# Altium PCB PCB1.PcbDoc (part 2 of 9)
Units mm, origin at the board's own origin, x right, y up, seen from the top; angles counter-clockwise.
Board outline 227 x 102 mm, 4 copper layers (Top Layer, MidLayer1, MidLayer2, Bottom Layer); 425 components, 426 nets, 1455 pads, 440 vias.
Unrouted connection lines stored in the file: 2.
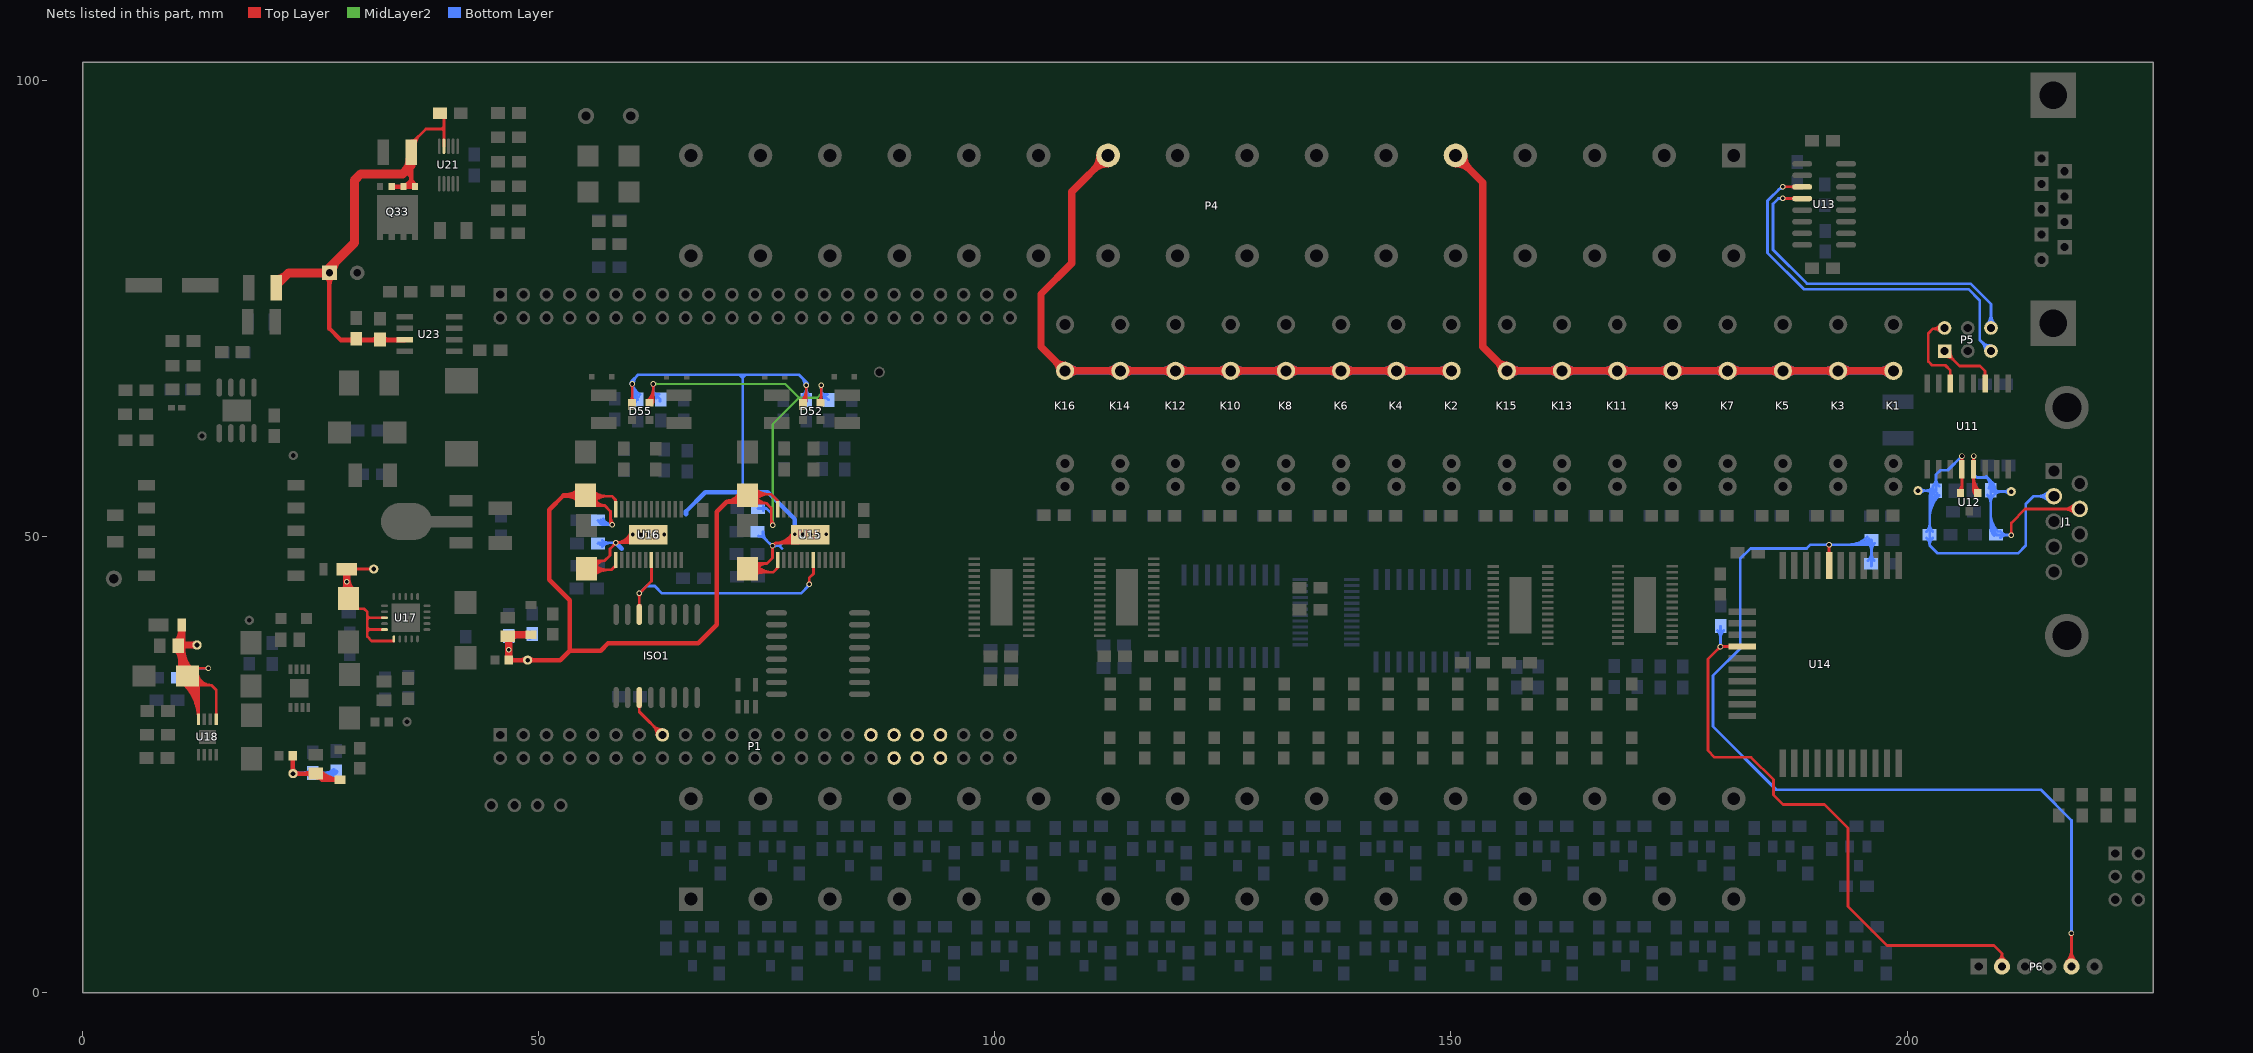
[diagram p4: the nets of this part, all layers, seen from the top]

## Via types
v1: diameter 0.6, hole 0.4, Top Layer to Bottom Layer, 427 vias
v2: diameter 0.5, hole 0.2, Top Layer to Bottom Layer, 9 vias
v3: diameter 0.66, hole 0.33, Top Layer to Bottom Layer, 4 vias

## Nets (pads, with @x,y where several pads share a name; then routed paths per layer and width w, separated by ;. In a path a pad name is that pad's centre, name@x,y a point inside that pad or via, vN(x,y) a via of type N, cw(c..) or ccw(c..) an arc to the next point about the centre after c; other vN are vias at no path point) (continued)
+15V_ISO: C29.1 C31.1 C33.1 C42.1 C44.1 C46.1 C56.1 C57.2 D52.4 D55.4 D58.1 L1.2 R138.1 TP3.1 U15.24 U16.24 | length 197
  Top Layer w0.3: C42.1@54.91,54.417 ccw(c55.962,54.484) C42.1@55.962,53.43 ; C42.1@55.21,54.436 ccw(c56.281,54.504) 56.281,53.43 ; C42.1@55.509,54.455 ccw(c56.601,54.524) 56.601,53.43 ; C42.1@55.605,53.935 cw(c56.872,52.668) 56.872,54.46 ; C42.1@55.605,54.925 ccw(c56.728,56.048) 56.728,54.46 ; C42.1@55.809,54.474 ccw(c56.92,54.544) 56.92,53.43 ; C42.1@55.817,53.723 cw(c57.597,51.943) 57.597,54.46 ; C42.1@55.817,55.137 ccw(c57.452,56.772) 57.452,54.46 ; C42.1@55.88,54.3 56.04,54.46 58.03,54.46 58.461,54.029 U16.24@58.461,53.026 ; C42.1@56.04,53.43 57.24,53.43 ; C42.1@56.108,54.493 ccw(c57.24,54.564) 57.24,53.43 ; 57.87,52.175 ccw(c58.915,52.175) v1@58.176,51.436 ; v1(58.07,51.33) 57.87,51.53 57.87,52.8 57.24,53.43 ; 58.177,54.313 cw(c57.59,53.725) U16.24@58.421,53.725 ; D55.4@61.946,64.894 ccw(c60.462,66.378) 62.56,66.378 ; D55.4@62.158,64.682 ccw(c61.186,65.654) 62.56,65.654 ; D55.4@62.2,64.48 62.56,64.84 v1(62.56,66.76) ; D55.4@62.37,64.47 ccw(c61.911,64.929) D55.4@62.56,64.929 ; v1@62.454,66.654 cw(c62.198,66.398) 62.56,66.398 cw(c62.922,66.398) v1@62.666,66.654 ; C29.1@72.95,54.35 73.27,54.67 75.47,54.67 76.211,53.929 U15.24@76.211,53.026 ; C29.1@72.969,54.447 ccw(c73.869,54.604) C29.1@73.869,53.69 ; C29.1@73.09,53.69 74.94,53.69 ; C29.1@73.264,54.499 ccw(c74.226,54.667) 74.226,53.69 ; C29.1@73.365,54.185 cw(c74.536,53.014) 74.536,54.67 ; C29.1@73.365,55.175 ccw(c74.584,56.394) 74.584,54.67 ; C29.1@73.56,54.55 ccw(c74.583,54.729) 74.583,53.69 ; C29.1@73.577,53.973 cw(c75.26,52.29) 75.26,54.67 ; C29.1@73.577,55.387 ccw(c75.308,57.118) 75.308,54.67 ; C29.1@73.855,54.602 ccw(c74.94,54.791) 74.94,53.69 ; 75.48,52.077 ccw(c76.457,52.077) v1@75.766,51.386 ; v1(75.66,51.28) 75.48,51.46 75.48,53.15 74.94,53.69 ; 75.998,54.142 cw(c75.581,53.725) U15.24@76.171,53.725 ; D52.4@80.686,64.894 ccw(c80.023,65.557) 80.96,65.557 ; v1@80.854,66.514 cw(c80.598,66.258) 80.96,66.258 cw(c81.322,66.258) v1@81.066,66.514 ; D52.4@80.88,64.7 80.96,64.78 v1(80.96,66.62) ; 80.96,65.171 ccw(c81.351,65.171) D52.4@81.074,64.894
  Top Layer w0.5: L1.2@46.72,36.5 46.73,36.49 52.38,36.49 53.42,37.53 ; L1.2@46.879,36.341 cw(c47.239,35.981) 47.239,36.49 ; L1.2@46.879,36.659 ccw(c47.287,37.067) 47.287,36.49 ; TP3.1@48.608,36.308 ccw(c48.167,35.867) 48.167,36.49 ccw(c48.167,37.113) TP3.1@48.608,36.672 ; TP3.1@48.972,36.308 cw(c49.413,35.867) 49.413,36.49 cw(c49.413,37.113) TP3.1@48.972,36.672 ; 52.877,54.53 ccw(c52.877,56.788) C42.1@54.474,55.191 ; 52.998,54.53 cw(c52.998,52.443) C42.1@54.474,53.919 ; C42.1@55.11,54.555 55.085,54.53 52.72,54.53 51.17,52.98 51.17,45.3 53.42,43.05 53.42,37.53 ; 71.392,53.86 ccw(c71.392,55.071) C29.1@72.503,54.589 ; C29.1@72.044,54.788 cw(c70.63,55.402) 70.63,53.86 ; C29.1@72.51,53.86 70.63,53.86 ; 53.42,37.53 56.79,37.53 57.6,38.34 67.51,38.34 69.52,40.35 69.52,52.75 70.63,53.86
  Top Layer w0.8: C56.1@46.61,39.084 46.788,39.262 D58.1@49.16,39.262 ; C56.1@46.66,39.29 C56.1@46.72,39.23 ; L1.2@46.72,36.5 C56.1@46.72,39.084 ; 46.72,38.384 cw(c47.475,38.384) 46.941,38.918 cw(c47.773,38.086) 47.773,39.262
  MidLayer2 w0.254: v1(62.56,66.76) 77.03,66.76 78.54,65.25 ; v1@62.682,66.638 cw(c62.978,66.342) 62.978,66.76 cw(c62.978,67.178) v1@62.682,66.882 ; v1@75.538,51.402 ccw(c75.242,51.698) 75.66,51.698 ccw(c76.078,51.698) v1@75.782,51.402 ; v1(75.66,51.28) 75.66,62.37 78.54,65.25 ; v1@80.838,66.498 cw(c80.591,66.251) 80.94,66.251 ; 80.94,66.154 cw(c81.426,66.154) v1@81.082,66.498 ; v1(80.96,66.62) 80.94,66.6 80.94,65.66 80.53,65.25 78.54,65.25
  Bottom Layer w0.3: C44.1@56.51,51.8 56.98,51.33 v1(58.07,51.33) cw(c58.07,52.398) C44.1@57.085,51.987 ; C44.1@56.531,51.756 ccw(c57.17,52.022) C44.1@57.17,51.33 ; C44.1@56.808,51.871 ccw(c57.62,52.21) 57.62,51.33 ; v1@57.964,51.224 ccw(c57.708,50.968) 57.708,51.33 ccw(c57.708,51.692) v1@57.964,51.436 ; v1@62.454,66.654 cw(c62.198,66.398) 62.56,66.398 cw(c62.922,66.398) v1@62.666,66.654 ; v1(62.56,66.76) 62.56,65.85 63.29,65.12 C46.1@63.29,64.86 ; 62.636,65.774 ccw(c63.027,66.165) C46.1@63.212,65.644 ; 62.654,65.756 cw(c62.085,65.187) C46.1@62.89,65.187 ; C31.1@74.05,53.12 74.98,53.12 75.66,52.44 v1(75.66,51.28) ; C31.1@74.606,52.894 cw(c74.98,52.698) 74.98,53.12 cw(c74.98,53.542) C31.1@74.606,53.346 ; v1@75.554,51.386 ccw(c75.298,51.642) 75.66,51.642 ccw(c76.022,51.642) v1@75.766,51.386 ; v1@80.854,66.514 cw(c80.598,66.258) 80.96,66.258 cw(c81.322,66.258) v1@81.066,66.514 ; v1(80.96,66.62) 80.96,65.84 C33.1@81.78,65.02 ; 81.024,65.776 ccw(c81.475,66.228) C33.1@81.648,65.614 ; 81.042,65.758 cw(c80.431,65.147) C33.1@81.295,65.147
  Bottom Layer w0.5: C57.2@46.448,38.741 cw(c45.791,38.084) 46.72,38.084 cw(c47.649,38.084) C57.2@46.992,38.741 ; v1(46.72,37.63) C57.2@46.72,39.14 49.09,39.14 R138.1@49.28,39.33 ; C57.2@46.992,38.868 cw(c47.649,38.211) 47.649,39.14 cw(c47.649,40.069) C57.2@46.992,39.412 ; 48.198,39.14 ccw(c48.198,40.285) R138.1@49.008,39.475 ; 48.503,39.14 cw(c48.503,38.426) R138.1@49.008,38.931
+16V_ISO: C58.1 C76.1 D63.1 TP4.1 U17.13 U17.15 U17.16 | length 23.6
  Top Layer w0.3: D63.1@29.177,46.238 29.409,46.47 TP4.1@31.92,46.47 ; C58.1@29.98,42.12 30.85,42.12 31.22,41.75 31.22,39.06 31.685,38.595 U17.16@34.125,38.595 ; 31.22,39.62 31.44,39.84 ; 31.22,40.06 31.44,39.84 ; 31.22,40.97 31.39,41.14 ; 31.22,41.31 31.39,41.14 ; U17.15@33.1,39.84 31.44,39.84 ; U17.13@33.1,41.14 31.39,41.14
  Top Layer w0.8: C58.1@28.6,43.89 ccw(c27.718,44.772) v1@28.965,44.772 ; D63.1@28.753,46.238 cw(c28.241,45.726) 28.965,45.726 cw(c29.689,45.726) D63.1@29.177,46.238 ; 28.965,45.569 ccw(c31.339,45.569) C58.1@29.66,43.89 ; D63.1@28.965,46.45 28.965,43.4 C58.1@29.13,43.235
  Bottom Layer w0.8: C76.1@28.93,43.81 28.965,43.845 v1(28.965,45.07) ; 28.965,44.384 ccw(c29.703,44.384) C76.1@29.181,43.862
+24VDC_LIMIT: C86.1 C89.2 C90.2 C92.1 L4.1 Q33.1 Q33.2 Q33.3 R152.1 U21.9 U23.7 | length 74.8
  Top Layer w0.3: C86.1@36.014,92.14 36.014,93.094 37.63,94.71 39.37,94.71 ; C86.1@36.014,93.387 ccw(c36.014,94.094) 36.514,93.594 ; C86.1@36.199,92.902 cw(c37.109,92.902) 36.466,93.546 ; C86.1@36.499,92.902 cw(c38.133,92.902) 36.978,94.058 ; R152.1@39.56,96.34 39.614,96.286 U21.9@39.614,92.81 ; 39.614,94.466 39.37,94.71 ; 39.614,94.954 39.37,94.71
  Top Layer w0.5: C92.1@26.677,78.551 cw(c25.738,77.612) 27.066,77.612 cw(c28.394,77.612) C92.1@27.455,78.551 ; C92.1@27.066,78.94 27.066,72.834 28.32,71.58 35.316,71.58 U23.7@35.33,71.594 ; 29.063,71.58 ccw(c29.063,72.52) C89.2@29.728,71.855 ; 29.078,71.58 cw(c29.078,70.661) C89.2@29.728,71.311 ; C89.2@30.272,71.311 cw(c30.922,70.661) 30.922,71.58 ; C89.2@30.272,71.855 ccw(c30.937,72.52) 30.937,71.58 ; 31.584,71.58 ccw(c31.584,72.646) C90.2@32.338,71.892 ; 31.777,71.58 cw(c31.777,70.787) C90.2@32.338,71.348 ; C90.2@32.882,71.348 cw(c33.443,70.787) 33.443,71.58 ; C90.2@32.882,71.892 ccw(c33.636,72.646) 33.636,71.58 ; Q33.3@33.891,88.396 Q33.1@36.447,88.396 ; Q33.2@35.169,88.521 ccw(c35.169,89.371) 35.77,88.77 ; Q33.2@35.214,88.509 ccw(c35.356,88.744) 35.55,88.55 36.014,89.014 ; 35.55,89.99 36.014,89.526 ; C86.1@35.742,91.106 cw(c35.085,90.449) 36.014,90.449 cw(c36.943,90.449) C86.1@36.286,91.106 ; C86.1@35.825,91.042 cw(c35.644,90.72) 36.014,90.72 ; 36.194,88.834 cw(c35.795,88.434) Q33.1@36.36,88.434 ; C86.1@36.203,91.042 ccw(c36.384,90.72) 36.014,90.72 ; Q33.1@36.478,88.55 36.014,89.014 ; 36.014,89.014 36.014,90.72
  Top Layer w1: L4.1@21.2,77.53 22.61,78.94 C92.1@27.066,78.94 27.066,79.506 29.81,82.25 29.81,89.09 30.51,89.79 35.084,89.79 36.014,90.72 C86.1@36.014,92.14 ; L4.1@21.254,78.197 ccw(c21.254,79.677) 22.3,78.63 ; C92.1@27.366,78.94 cw(c29.457,78.94) 27.978,80.418 ; 35.413,90.119 ccw(c34.278,91.255) C86.1@35.879,91.368
-15V_ISO: C30.2 C32.2 C34.1 C43.2 C45.2 C47.1 C63.2 C64.2 D52.1 D55.1 D60.2 L2.2 R139.1 TP6.1 U15.1 U15.25 U16.1 U16.25 | length 181.3
  Top Layer w0.3: C43.2@55.319,46.617 cw(c56.196,46.495) C43.2@56.196,47.38 ; C43.2@55.616,46.576 cw(c56.54,46.447) 56.54,47.38 ; C43.2@55.7,46.3 55.78,46.38 57.95,46.38 58.461,46.891 U16.1@58.461,47.464 ; C43.2@55.715,45.886 cw(c56.907,44.694) 56.907,46.38 ; C43.2@55.715,46.876 ccw(c56.913,48.074) 56.913,46.38 ; C43.2@55.913,46.534 cw(c56.885,46.399) 56.885,47.38 ; C43.2@55.927,45.674 cw(c57.632,43.97) 57.632,46.38 ; C43.2@55.927,47.088 ccw(c57.637,48.798) 57.637,46.38 ; C43.2@56.02,47.38 57.23,47.38 ; C43.2@56.21,46.493 cw(c57.23,46.351) 57.23,47.38 ; 58.177,46.607 cw(c58.461,46.323) U16.1@58.461,46.725 ; 58.19,49.07 ccw(c57.9,49.36) v1@58.31,49.36 ; 58.238,49.118 cw(c58.46,48.896) v1@58.46,49.21 ; v1@58.566,49.254 cw(c58.822,48.998) 58.822,49.36 cw(c58.822,49.722) v1@58.566,49.466 ; 58.883,49.36 ccw(c58.883,50.977) U16.25@60.409,50.443 ; 59.305,49.36 ccw(c59.305,50.829) U16.25@60.692,50.344 ; 59.728,49.36 ccw(c59.728,50.681) U16.25@60.975,50.246 ; D55.1@60.046,64.869 ccw(c59.552,65.363) 60.25,65.363 ; U16.25@60.126,50.542 cw(c58.46,51.124) v1(58.46,49.36) ; v1@60.144,66.654 cw(c59.888,66.398) 60.25,66.398 cw(c60.612,66.398) v1@60.356,66.654 ; U16.25@60.15,49.36 ccw(c60.15,50.534) U16.25@61.258,50.147 ; D55.1@60.24,64.5 60.25,64.51 v1(60.25,66.76) ; 60.25,65.315 ccw(c60.88,65.315) D55.1@60.434,64.869 ; U16.25@60.66,49.47 60.55,49.36 v1(58.46,49.36) ; C30.2@72.84,46.28 73.01,46.11 75.68,46.11 ; C30.2@73.181,46.644 ccw(c74.358,47.674) 74.358,46.11 ; C30.2@73.25,46.479 cw(c74.133,46.114) 74.133,47.07 ; C30.2@73.32,47.07 75.03,47.07 ; C30.2@73.407,46.842 ccw(c75.019,48.251) 75.019,46.11 ; C30.2@73.527,46.364 cw(c74.582,45.929) 74.582,47.07 ; C30.2@73.587,45.674 cw(c74.64,44.621) 74.64,46.11 ; C30.2@73.587,47.338 ccw(c74.235,47.986) 74.235,47.07 ; C30.2@73.633,47.039 ccw(c75.68,48.829) 75.68,46.11 ; C30.2@73.804,46.25 cw(c75.03,45.744) 75.03,47.07 ; v1@75.524,48.904 cw(c75.268,48.648) 75.63,48.648 cw(c75.992,48.648) v1@75.736,48.904 ; v1@75.63,49.16 ccw(c75.63,49.522) 75.886,49.266 ccw(c76.142,49.01) v1@75.78,49.01 ; 76.055,46.485 ccw(c75.774,46.765) U15.1@76.171,46.765 ; U15.1@76.211,47.464 76.211,46.641 75.68,46.11 ; 76.408,49.33 ccw(c76.408,51.259) U15.25@78.176,50.487 ; 76.867,49.33 ccw(c76.867,51.058) U15.25@78.451,50.367 ; 77.325,49.33 ccw(c77.325,50.858) U15.25@78.726,50.247 ; U15.25@77.783,49.33 ccw(c77.783,50.658) U15.25@79.001,50.127 ; U15.25@77.901,50.607 cw(c75.95,51.459) 75.95,49.33 ; U15.25@78.53,49.33 75.95,49.33 ; D52.1@78.786,64.869 ccw(c77.471,66.184) 79.33,66.184 ; D52.1@78.98,64.5 79.33,64.85 v1(79.33,66.61) ; D52.1@78.998,64.657 ccw(c78.195,65.46) 79.33,65.46 ; v1@79.224,66.504 cw(c78.968,66.248) 79.33,66.248 cw(c79.692,66.248) v1@79.436,66.504 ; 57.23,47.38 57.81,47.96 57.81,48.69 58.461,49.341 58.461,49.359 v1(58.46,49.36) ; 75.03,47.07 75.63,47.67 v1(75.63,49.01) 75.95,49.33
  Top Layer w0.5: L2.2@22.871,25.816 cw(c22.487,25.432) 23.03,25.432 cw(c23.573,25.432) L2.2@23.189,25.816 ; TP6.1@22.888,24.232 ccw(c22.544,24.576) 23.03,24.576 ; 23.03,24.769 ccw(c23.789,24.769) 23.252,24.232 ccw(c23.693,24.673) 23.693,24.05 ccw(c23.693,23.427) TP6.1@23.252,23.868 ; L2.2@23.03,26 23.03,24.09 TP6.1@23.07,24.05 25.551,24.05 C63.2@25.565,24.064 26.247,23.383 D60.2@28.21,23.383 cw(c28.21,26.414) C63.2@26.01,24.329 ; 24.437,24.05 ccw(c24.437,25.027) C63.2@25.128,24.336 ; 24.504,24.05 cw(c24.504,23.168) C63.2@25.128,23.792 ; C63.2@25.647,23.985 ccw(c27.047,25.312) 27.047,23.383 ; C63.2@25.73,23.679 cw(c25.73,23.148) C63.2@26.105,23.524 ; C63.2@26.082,23.908 ccw(c26.445,23.746) C63.2@26.164,23.465 ; D60.2@27.911,23.236 ccw(c27.557,22.882) 27.557,23.383 ccw(c27.557,23.883) D60.2@27.911,23.529
  Bottom Layer w0.3: C45.2@56.496,49.27 56.586,49.36 v1(58.46,49.36) ; C45.2@56.754,49.139 cw(c57.287,48.606) 57.287,49.36 ; C45.2@56.966,48.927 cw(c58.012,47.882) 58.012,49.36 ; C45.2@56.966,49.613 ccw(c57.577,50.224) 57.577,49.36 ; v1@58.354,49.254 ccw(c58.098,48.998) 58.098,49.36 ccw(c58.098,49.722) v1@58.354,49.466 ; v1@60.1,66.76 cw(c60.631,66.76) 60.256,67.136 ; v1@60.144,66.654 cw(c59.888,66.398) 60.25,66.398 cw(c60.612,66.398) v1@60.356,66.654 ; v1@60.144,66.866 ccw(c59.888,67.122) 60.25,67.122 ccw(c60.612,67.122) v1@60.356,66.866 ; C47.1@60.25,65.518 ccw(c61.053,65.518) C47.1@60.632,64.834 ; 60.25,66.055 ccw(c61.385,66.055) C47.1@60.789,65.089 ; v1@60.25,66.592 ccw(c61.716,66.592) C47.1@60.947,65.344 ; v1@60.4,66.76 cw(c61.655,66.76) 60.768,67.648 ; C47.1@60.85,65.06 60.25,65.66 60.25,67.13 ; C47.1@61.104,65.6 cw(c62.048,67.13) 60.25,67.13 ; 72.04,54.88 72.36,55.2 ; 72.04,67.76 72.36,67.44 72.68,67.76 ; 72.36,67.76 72.36,55.2 ; 72.68,54.88 72.36,55.2 ; C32.2@74.103,50.085 cw(c74.103,49.091) 74.806,49.794 ; C32.2@74.466,50.134 75.59,49.01 76.39,49.01 ; C32.2@74.588,50.57 ccw(c75.937,50.57) 74.983,49.617 ; 75.306,49.294 ccw(c75.63,49.619) v1@75.63,49.16 ; v1@75.736,48.904 cw(c75.992,48.648) 75.992,49.01 cw(c75.992,49.372) v1@75.736,49.116 ; 76.68,48.72 76.39,49.01 ; 76.68,49.3 76.39,49.01 ; 78.805,67.515 cw(c77.9,66.61) v1@79.18,66.61 ; C34.1@78.977,65.49 ccw(c78.125,66.342) v1@79.33,66.342 ; v1@79.224,66.504 cw(c78.968,66.248) 79.33,66.248 cw(c79.692,66.248) v1@79.436,66.504 ; v1@79.224,66.716 ccw(c78.968,66.972) 79.33,66.972 ccw(c79.692,66.972) v1@79.436,66.716 ; 79.317,67.003 cw(c78.925,66.61) v1@79.48,66.61 ; C34.1@79.32,65.02 79.33,65.03 79.33,66.99 78.56,67.76 60.88,67.76 60.25,67.13 ; 79.33,66.294 ccw(c80.467,66.294) C34.1@79.663,65.49
  Bottom Layer w0.5: TP6.1@23.07,24.05 27.58,24.05 R139.1@27.79,24.26 ; TP6.1@23.252,23.868 cw(c23.693,23.427) 23.693,24.05 cw(c23.693,24.673) TP6.1@23.252,24.232 ; 24.18,24.05 ccw(c24.18,25.164) C64.2@24.968,24.376 ; 24.441,24.05 cw(c24.441,23.305) C64.2@24.968,23.832 ; C64.2@25.512,23.832 cw(c26.039,23.305) 26.039,24.05 ; C64.2@25.512,24.376 ccw(c26.3,25.164) 26.3,24.05 ; 26.66,24.05 ccw(c26.66,25.263) R139.1@27.518,24.405 ; 27.061,24.05 cw(c27.061,23.404) R139.1@27.518,23.861 ; v1(58.46,49.36) 59.12,48.7 ; 66.15,52.47 66.15,52.78 68.25,54.88 75.13,54.88 78.06,51.95 v1(78.06,50.29)
  other v1: 60.31,50.26 61.177,50.26 62.045,50.26 62.912,50.26 63.78,50.26 78.928,50.29 79.795,50.29 80.663,50.29 81.53,50.29
-16V_ISO: C65.2 C66.2 C84.2 D66.2 TP5.1 U18.5 U18.8 | length 63.3
  Top Layer w0.3: C65.2@10.934,34.017 cw(c7.053,29.902) U18.8@12.71,29.902 ; C65.2@11.132,34.638 ccw(c12.247,34.882) C65.2@12.247,33.74 ; C65.2@11.14,34.236 cw(c7.708,30.597) U18.8@12.71,30.597 ; C65.2@11.346,34.454 cw(c8.364,31.292) 12.71,31.292 ; C65.2@11.425,34.702 ccw(c12.62,34.963) C65.2@12.62,33.74 ; C65.2@11.495,34.745 12.356,35.606 v1(13.805,35.606) ; C65.2@11.551,34.672 cw(c9.02,31.988) 12.71,31.988 ; C65.2@11.718,34.766 ccw(c12.992,35.045) 12.992,33.74 ; C65.2@11.757,34.891 cw(c9.675,32.683) 12.71,32.683 ; C65.2@11.925,33.793 cw(c12.149,33.094) 12.667,33.613 cw(c13.127,34.073) C65.2@12.533,34.338 ; C65.2@11.963,35.109 cw(c10.331,33.378) 12.71,33.378 ; C65.2@12.011,34.83 ccw(c13.365,35.126) 13.365,33.74 ; C65.2@12.304,34.894 ccw(c13.737,35.207) 13.737,33.74 ; C65.2@12.597,34.958 ccw(c14.11,35.289) 14.11,33.74 ; U18.8@12.71,30.026 12.71,33.57 12.54,33.74 14.11,33.74 ; U18.5@14.661,30.026 14.661,33.189 14.11,33.74
  Top Layer w0.8: C84.2@10.31,37.749 cw(c8.945,36.384) 10.875,36.384 ; C84.2@10.31,38.411 ccw(c8.945,39.776) D66.2@10.875,39.776 ; C84.2@10.476,38.08 10.536,38.14 TP5.1@12.55,38.14 ; C84.2@10.642,37.914 cw(c11.188,37.368) 11.188,38.14 ; C65.2@10.875,35.819 ccw(c12.444,35.819) C65.2@11.335,34.71 ; C84.2@10.875,37.751 ccw(c14.376,37.751) C65.2@11.9,35.275 ; D66.2@10.875,40.33 10.875,35.365 C65.2@11.495,34.745
  Bottom Layer w0.3: C66.2@10.655,34.515 11.746,35.606 v1(13.805,35.606)
/RESET1: C26.2 P6.5 R124.1 U14.7 | length 116.3
  Top Layer w0.3: U14.7@191.309,48.155 ccw(c190.991,48.473) 191.44,48.473 ; v1@191.334,49.034 cw(c191.078,48.778) 191.44,48.778 cw(c191.802,48.778) v1@191.546,49.034 ; 191.44,48.521 ccw(c191.957,48.521) U14.7@191.591,48.155 ; v1(191.44,49.14) 191.44,46.874 U14.7@191.45,46.864 ; P6.5@217.487,3.423 ccw(c216.226,4.684) 218.01,4.684 ccw(c219.794,4.684) P6.5@218.533,3.423 ; P6.5@217.7,3.21 ccw(c216.95,3.96) 218.01,3.96 ccw(c219.07,3.96) P6.5@218.32,3.21 ; v1@217.904,6.424 cw(c217.648,6.168) 218.01,6.168 cw(c218.372,6.168) v1@218.116,6.424 ; P6.5@218.01,2.9 v1(218.01,6.53)
  Bottom Layer w0.3: v1@191.334,49.034 ccw(c191.078,48.778) 191.078,49.14 ccw(c191.078,49.502) v1@191.334,49.246 ; v1@191.546,49.034 cw(c191.802,48.778) 191.802,49.14 cw(c191.802,49.502) v1@191.546,49.246 ; 193.571,49.14 ccw(c193.571,52.052) R124.1@195.63,49.993 ; 194.295,49.14 ccw(c194.295,51.328) R124.1@195.842,49.781 ; 195.019,49.14 ccw(c195.019,50.604) R124.1@196.054,49.569 ; C26.2@195.711,47.393 ccw(c194.772,48.332) 196.1,48.332 ; R124.1@195.757,49.307 cw(c194.929,48.479) 196.1,48.479 cw(c197.271,48.479) R124.1@196.443,49.307 ; C26.2@196.07,46.79 196.1,46.82 R124.1@196.1,49.65 ; 196.1,48.11 ccw(c197.114,48.11) C26.2@196.397,47.393 ; R124.1@196.1,49.26 195.98,49.14 189.4,49.14 188.99,48.73 182.82,48.73 181.71,47.62 181.71,37.77 178.73,34.79 178.73,29.2 185.65,22.28 214.66,22.28 218.01,18.93 v1(218.01,6.53) ; v1@217.904,6.636 ccw(c217.648,6.892) 218.01,6.892 ccw(c218.372,6.892) v1@218.116,6.636
\C\S_AO: ISO1.14 U15.7 U16.7 | length 32.3
  Top Layer w0.3: ISO1.14@60.919,42.446 ccw(c60.663,42.702) 61.025,42.702 ccw(c61.387,42.702) ISO1.14@61.131,42.446 ; v1@60.919,43.699 cw(c60.663,43.443) 61.025,43.443 cw(c61.387,43.443) v1@61.131,43.699 ; ISO1.14@61.025,41.49 v1(61.025,43.805) 62.363,45.143 U16.7@62.363,47.464 ; v1@61.025,43.955 ccw(c61.025,44.317) 61.281,44.061 ccw(c61.537,43.805) v1@61.175,43.805 ; v1@79.564,44.916 ccw(c79.356,45.124) 79.65,45.124 ; v1@79.65,44.81 79.65,45.49 80.113,45.953 U15.7@80.113,47.464 ; 79.65,45.22 ccw(c80.08,45.22) v1@79.776,44.916
  Bottom Layer w0.3: v1(61.025,43.805) 61.82,44.6 62.72,44.6 63.51,43.81 78.74,43.81 79.57,44.64 v1@79.65,44.64 ; v1@61.025,43.955 ccw(c61.025,44.317) 61.281,44.061 ccw(c61.537,43.805) v1@61.175,43.805 ; 79.364,44.434 ccw(c78.989,44.81) v1@79.52,44.81
  other v1: 79.67,44.81
\C\S_DIG: ISO1.3 P1.15 | length 8
  Top Layer w0.3: ISO1.3@60.919,31.434 cw(c60.663,31.178) 61.025,31.178 cw(c61.387,31.178) ISO1.3@61.131,31.434 ; ISO1.3@61.025,32.39 61.025,30.825 P1.15@63.56,28.29 ; P1.15@62.96,28.29 ccw(c61.511,28.29) 62.536,29.314 ccw(c63.56,30.339) P1.15@63.56,28.89
AIN0: P1.39
AIN1: P1.40
AIN2: P1.37
AIN3: P1.38
AIN4: P1.33
AIN5: P1.36
AIN6: P1.35
BOOT1: P6.2 R127.1 U14.15 | length 71.7
  Top Layer w0.3: v1@179.39,37.97 cw(c179.028,37.97) 179.284,37.714 cw(c179.54,37.458) v1@179.54,37.82 ; v1@179.646,37.864 cw(c179.902,37.608) 179.902,37.97 cw(c179.902,38.332) v1@179.646,38.076 ; 180.271,37.97 ccw(c180.271,38.494) U14.15@180.642,38.123 ; 180.329,37.97 cw(c180.329,37.528) U14.15@180.642,37.841 ; U14.15@181.933,37.982 181.921,37.97 v1(179.54,37.97) 178.16,36.59 178.16,26.577 178.907,25.83 182.89,25.83 185.34,23.38 185.34,21.72 186.4,20.66 190.94,20.66 193.51,18.09 193.51,9.5 197.81,5.2 209.5,5.2 210.39,4.31 ; P6.2@209.97,3.508 ccw(c209.414,4.31) 210.39,4.31 ; P6.2@210.39,2.9 210.39,4.31 ; P6.2@210.81,3.508 cw(c211.366,4.31) 210.39,4.31
  Bottom Layer w0.3: R127.1@179.207,39.74 cw(c178.379,38.912) 179.55,38.912 cw(c180.721,38.912) R127.1@179.893,39.74 ; v1@179.434,38.076 ccw(c179.154,38.356) 179.55,38.356 ; v1(179.54,37.97) 179.55,37.98 R127.1@179.55,40.21 ; 179.55,38.308 ccw(c179.878,38.308) v1@179.646,38.076
CAN_H: C18.2 J1.7 R121.1 TP2.1 U11.13 U12.1 | length 55.5
  Top Layer w0.3: U11.13@207.169,56.604 cw(c206.913,56.348) 207.275,56.348 cw(c207.637,56.348) U11.13@207.381,56.604 ; U11.13@207.169,58.216 ccw(c206.877,58.508) 207.29,58.508 ; v1@207.184,58.754 cw(c206.928,58.498) 207.29,58.498 cw(c207.652,58.498) v1@207.396,58.754 ; 207.275,55.162 ccw(c208.052,55.162) U12.1@207.503,54.613 ; 207.275,55.886 ccw(c208.776,55.886) U12.1@207.715,54.825 ; U11.13@207.275,56.61 ccw(c209.5,56.61) U12.1@207.927,55.037 ; 207.29,58.436 ccw(c207.601,58.436) U11.13@207.381,58.216 ; v1(207.29,58.86) 207.29,57.425 U11.13@207.275,57.41 207.275,55.285 U12.1@207.75,54.81 ; 207.3,55.26 ccw(c207.672,55.632) U12.1@207.725,55.109 ; U12.1@207.359,55.201 cw(c207.017,54.86) U12.1@207.5,54.86 ; v1@211.314,50.296 ccw(c211.058,50.552) 211.42,50.552 ccw(c211.782,50.552) v1@211.526,50.296 ; v1(211.42,50.19) 211.42,51.54 212.92,53.04 218.895,53.04 J1.7@218.92,53.065 ; 217.049,53.04 ccw(c217.049,54.936) J1.7@218.39,53.595 ; 217.17,53.04 cw(c217.17,51.315) J1.7@218.39,52.535 ; 217.773,53.04 ccw(c217.773,54.212) J1.7@218.602,53.383 ; 217.894,53.04 cw(c217.894,52.039) J1.7@218.602,52.747
  Bottom Layer w0.3: v1@207.184,58.754 cw(c206.928,58.498) 207.29,58.498 cw(c207.652,58.498) v1@207.396,58.754 ; v1(207.29,58.86) 207.29,56.89 207.67,56.51 208.78,56.51 209.32,55.97 209.32,55.254 R121.1@209.156,55.09 ; 208.681,56.609 cw(c207.793,55.721) R121.1@208.981,55.315 ; R121.1@208.813,54.582 cw(c207.985,53.754) 209.156,53.754 cw(c210.327,53.754) 209.499,54.582 cw(c210.412,53.669) 210.412,54.96 ; 209.021,56.269 cw(c208.3,55.548) R121.1@209.265,55.218 ; 209.156,51.08 ccw(c210.459,51.08) C18.2@209.538,50.159 ; 209.156,51.804 ccw(c211.183,51.804) C18.2@209.75,50.371 ; 209.156,52.529 ccw(c211.908,52.529) C18.2@209.962,50.583 ; 209.361,55.929 cw(c208.807,55.374) R121.1@209.549,55.121 ; R121.1@209.499,55.268 ccw(c210.242,56.011) 210.242,54.96 ; C18.2@210.216,49.897 cw(c210.923,49.19) 210.923,50.19 ; C18.2@210.216,50.583 ccw(c211.165,51.532) v1@211.165,50.19 ; TP2.1@211.173,54.713 ccw(c210.575,54.115) 210.575,54.96 ccw(c210.575,55.805) TP2.1@211.173,55.207 ; v1@211.314,50.084 ccw(c211.058,49.828) 211.058,50.19 ccw(c211.058,50.552) v1@211.314,50.296 ; v1(211.42,50.19) 209.796,50.19 209.156,50.83 R121.1@209.156,55.09 ; TP2.1@211.42,54.96 209.286,54.96 R121.1@209.156,55.09
CAN_L: C20.1 J1.2 R122.1 TP1.1 U11.12 U12.2 | length 61.1
  Top Layer w0.3: U12.2@205.673,55.037 ccw(c204.872,55.838) 206.005,55.838 ; U12.2@205.85,54.81 206.005,54.965 U11.12@206.005,57.41 206.01,57.415 v1(206.01,58.86) ; U11.12@205.899,56.604 cw(c205.643,56.348) 206.005,56.348 cw(c206.367,56.348) U11.12@206.111,56.604 ; U11.12@205.899,58.216 ccw(c205.631,58.484) 206.01,58.484 ; v1@205.904,58.754 cw(c205.648,58.498) 206.01,58.498 cw(c206.372,58.498) v1@206.116,58.754 ; 206.01,58.46 ccw(c206.355,58.46) U11.12@206.111,58.216
  Bottom Layer w0.3: TP1.1@201.19,55.06 203.154,55.06 R122.1@203.164,55.05 ; TP1.1@201.437,54.813 cw(c202.035,54.215) 202.035,55.06 cw(c202.035,55.905) TP1.1@201.437,55.307 ; 201.969,55.06 cw(c201.969,53.855) R122.1@202.821,54.707 ; 202.017,55.06 ccw(c202.017,56.197) R122.1@202.821,55.393 ; C20.1@202.127,50.573 ccw(c201.299,51.401) 202.47,51.401 ccw(c203.641,51.401) C20.1@202.813,50.573 ; C20.1@202.131,49.883 cw(c201.349,49.08) 202.47,49.08 ; 202.47,52.039 cw(c206.01,52.039) R122.1@203.507,54.542 ; 202.47,52.763 cw(c205.286,52.763) R122.1@203.295,54.754 ; 202.47,53.487 cw(c204.562,53.487) R122.1@203.083,54.966 ; 202.47,54.211 cw(c203.838,54.211) R122.1@202.871,55.178 ; C20.1@202.809,49.883 ccw(c203.591,49.08) 202.47,49.08 ; R122.1@202.821,55.558 ccw(c201.993,56.386) 203.164,56.386 ccw(c204.335,56.386) R122.1@203.507,55.558 ; v1@205.86,58.86 cw(c205.498,58.86) 205.754,58.604 cw(c206.01,58.348) v1@206.01,58.71 ; v1(206.01,58.86) 204.45,57.3 203.65,57.3 203.164,56.814 R122.1@203.164,55.05 ; J1.2@215.55,53.92 ccw(c214.269,52.639) 214.269,54.45 ccw(c214.269,56.261) J1.2@215.55,54.98 ; J1.2@215.762,54.132 ccw(c214.994,53.364) 214.994,54.45 ccw(c214.994,55.536) J1.2@215.762,54.768 ; J1.2@216.08,54.45 213.85,54.45 213,53.6 213,49.04 212.15,48.19 203.36,48.19 202.47,49.08 ; 202.47,49.08 202.47,54.356 R122.1@203.164,55.05
CAN_RXD: P5.1 U11.3 | length 9.5
  Top Layer w0.3: P5.1@204.11,69.76 cw(c204.11,68.311) 205.134,69.336 cw(c206.159,70.36) P5.1@204.71,70.36 ; P5.1@204.11,70.36 205.75,68.72 208,68.72 208.545,68.175 U11.3@208.545,66.81 ; U11.3@208.439,67.616 ccw(c208.183,67.872) 208.545,67.872 ccw(c208.907,67.872) U11.3@208.651,67.616
CAN_TXD: P5.2 U11.6 | length 12.4
  Top Layer w0.3: 202.903,72.8 cw(c202.903,71.693) P5.2@203.686,72.476 ; 203.361,72.8 ccw(c203.361,73.4) P5.2@203.861,73.067 ; P5.2@203.611,73.233 cw(c202.8,73.776) 202.8,72.8 ; P5.2@204.11,72.9 204.01,72.8 202.8,72.8 ; U11.6@204.629,67.616 ccw(c204.373,67.872) 204.735,67.872 ccw(c205.097,67.872) U11.6@204.841,67.616 ; U11.6@204.735,66.81 204.735,68.255 204.18,68.81 202.71,68.81 202.32,69.2 202.32,72.32 202.8,72.8
COM1: K1.2 K3.2 K5.2 K7.2 K9.2 K11.2 K13.2 K15.2 P4.9 | length 180.1
  Top Layer w0.8: P4.9@150.507,90.91 cw(c150.507,88.737) 152.043,90.274 cw(c153.58,91.81) P4.9@151.407,91.81 ; P4.9@150.507,91.81 153.48,88.837 153.48,70.841 K15.2@156.121,68.2 K1.2@198.49,68.2 ; K15.2@155.521,68.2 ccw(c154.073,68.2) 155.097,69.224 ccw(c156.121,70.249) K15.2@156.121,68.8 ; K15.2@156.546,67.776 cw(c157.57,66.751) 157.57,68.2 cw(c157.57,69.649) K15.2@156.546,68.624 ; K13.2@161.75,67.776 ccw(c160.725,66.751) 160.725,68.2 ccw(c160.725,69.649) K13.2@161.75,68.624 ; K13.2@162.598,67.776 cw(c163.623,66.751) 163.623,68.2 cw(c163.623,69.649) K13.2@162.598,68.624 ; K11.2@167.802,67.776 ccw(c166.778,66.751) 166.778,68.2 ccw(c166.778,69.649) K11.2@167.802,68.624 ; K11.2@168.651,67.776 cw(c169.675,66.751) 169.675,68.2 cw(c169.675,69.649) K11.2@168.651,68.624 ; K9.2@173.855,67.776 ccw(c172.831,66.751) 172.831,68.2 ccw(c172.831,69.649) K9.2@173.855,68.624 ; K9.2@174.704,67.776 cw(c175.728,66.751) 175.728,68.2 cw(c175.728,69.649) K9.2@174.704,68.624 ; K7.2@179.908,67.776 ccw(c178.883,66.751) 178.883,68.2 ccw(c178.883,69.649) K7.2@179.908,68.624 ; K7.2@180.756,67.776 cw(c181.781,66.751) 181.781,68.2 cw(c181.781,69.649) K7.2@180.756,68.624 ; K5.2@185.96,67.776 ccw(c184.936,66.751) 184.936,68.2 ccw(c184.936,69.649) K5.2@185.96,68.624 ; K5.2@186.809,67.776 cw(c187.833,66.751) 187.833,68.2 cw(c187.833,69.649) K5.2@186.809,68.624 ; K3.2@192.013,67.776 ccw(c190.989,66.751) 190.989,68.2 ccw(c190.989,69.649) K3.2@192.013,68.624 ; K3.2@192.862,67.776 cw(c193.886,66.751) 193.886,68.2 cw(c193.886,69.649) K3.2@192.862,68.624 ; K1.2@198.066,67.776 ccw(c197.041,66.751) 197.041,68.2 ccw(c197.041,69.649) K1.2@198.066,68.624
  Bottom Layer w0.8: K15.2@156.121,68.2 K1.2@198.49,68.2 ; K15.2@156.546,67.776 cw(c157.57,66.751) 157.57,68.2 cw(c157.57,69.649) K15.2@156.546,68.624 ; K13.2@161.75,67.776 ccw(c160.725,66.751) 160.725,68.2 ccw(c160.725,69.649) K13.2@161.75,68.624 ; K13.2@162.598,67.776 cw(c163.623,66.751) 163.623,68.2 cw(c163.623,69.649) K13.2@162.598,68.624 ; K11.2@167.802,67.776 ccw(c166.778,66.751) 166.778,68.2 ccw(c166.778,69.649) K11.2@167.802,68.624 ; K11.2@168.651,67.776 cw(c169.675,66.751) 169.675,68.2 cw(c169.675,69.649) K11.2@168.651,68.624 ; K9.2@173.855,67.776 ccw(c172.831,66.751) 172.831,68.2 ccw(c172.831,69.649) K9.2@173.855,68.624 ; K9.2@174.704,67.776 cw(c175.728,66.751) 175.728,68.2 cw(c175.728,69.649) K9.2@174.704,68.624 ; K7.2@179.908,67.776 ccw(c178.883,66.751) 178.883,68.2 ccw(c178.883,69.649) K7.2@179.908,68.624 ; K7.2@180.756,67.776 cw(c181.781,66.751) 181.781,68.2 cw(c181.781,69.649) K7.2@180.756,68.624 ; K5.2@185.96,67.776 ccw(c184.936,66.751) 184.936,68.2 ccw(c184.936,69.649) K5.2@185.96,68.624 ; K5.2@186.809,67.776 cw(c187.833,66.751) 187.833,68.2 cw(c187.833,69.649) K5.2@186.809,68.624 ; K3.2@192.013,67.776 ccw(c190.989,66.751) 190.989,68.2 ccw(c190.989,69.649) K3.2@192.013,68.624 ; K3.2@192.862,67.776 cw(c193.886,66.751) 193.886,68.2 cw(c193.886,69.649) K3.2@192.862,68.624 ; K1.2@198.066,67.776 ccw(c197.041,66.751) 197.041,68.2 ccw(c197.041,69.649) K1.2@198.066,68.624
COM2: K2.2 K4.2 K6.2 K8.2 K10.2 K12.2 K14.2 K16.2 P4.19 | length 181.9
  Top Layer w0.8: K16.2@107.1,68.2 ccw(c105.651,68.2) 106.676,69.224 ccw(c107.7,70.249) K16.2@107.7,68.8 ; K16.2@108.124,67.776 cw(c109.149,66.751) 109.149,68.2 cw(c109.149,69.649) K16.2@108.124,68.624 ; P4.19@111.507,91.81 cw(c109.334,91.81) 110.871,90.274 cw(c112.407,88.737) P4.19@112.407,90.91 ; P4.19@112.407,91.81 108.44,87.843 108.44,80 105.05,76.61 105.05,70.85 K16.2@107.7,68.2 K2.2@150.069,68.2 ; K14.2@113.328,67.776 ccw(c112.304,66.751) 112.304,68.2 ccw(c112.304,69.649) K14.2@113.328,68.624 ; K14.2@114.177,67.776 cw(c115.201,66.751) 115.201,68.2 cw(c115.201,69.649) K14.2@114.177,68.624 ; K12.2@119.381,67.776 ccw(c118.357,66.751) 118.357,68.2 ccw(c118.357,69.649) K12.2@119.381,68.624 ; K12.2@120.23,67.776 cw(c121.254,66.751) 121.254,68.2 cw(c121.254,69.649) K12.2@120.23,68.624 ; K10.2@125.434,67.776 ccw(c124.409,66.751) 124.409,68.2 ccw(c124.409,69.649) K10.2@125.434,68.624 ; K10.2@126.282,67.776 cw(c127.307,66.751) 127.307,68.2 cw(c127.307,69.649) K10.2@126.282,68.624 ; K8.2@131.486,67.776 ccw(c130.462,66.751) 130.462,68.2 ccw(c130.462,69.649) K8.2@131.486,68.624 ; K8.2@132.335,67.776 cw(c133.359,66.751) 133.359,68.2 cw(c133.359,69.649) K8.2@132.335,68.624 ; K6.2@137.539,67.776 ccw(c136.515,66.751) 136.515,68.2 ccw(c136.515,69.649) K6.2@137.539,68.624 ; K6.2@138.388,67.776 cw(c139.412,66.751) 139.412,68.2 cw(c139.412,69.649) K6.2@138.388,68.624 ; K4.2@143.592,67.776 ccw(c142.567,66.751) 142.567,68.2 ccw(c142.567,69.649) K4.2@143.592,68.624 ; K4.2@144.44,67.776 cw(c145.465,66.751) 145.465,68.2 cw(c145.465,69.649) K4.2@144.44,68.624 ; K2.2@149.644,67.776 ccw(c148.62,66.751) 148.62,68.2 ccw(c148.62,69.649) K2.2@149.644,68.624
  Bottom Layer w0.8: K16.2@107.7,68.2 K2.2@150.069,68.2 ; K16.2@108.124,67.776 cw(c109.149,66.751) 109.149,68.2 cw(c109.149,69.649) K16.2@108.124,68.624 ; K14.2@113.328,67.776 ccw(c112.304,66.751) 112.304,68.2 ccw(c112.304,69.649) K14.2@113.328,68.624 ; K14.2@114.177,67.776 cw(c115.201,66.751) 115.201,68.2 cw(c115.201,69.649) K14.2@114.177,68.624 ; K12.2@119.381,67.776 ccw(c118.357,66.751) 118.357,68.2 ccw(c118.357,69.649) K12.2@119.381,68.624 ; K12.2@120.23,67.776 cw(c121.254,66.751) 121.254,68.2 cw(c121.254,69.649) K12.2@120.23,68.624 ; K10.2@125.434,67.776 ccw(c124.409,66.751) 124.409,68.2 ccw(c124.409,69.649) K10.2@125.434,68.624 ; K10.2@126.282,67.776 cw(c127.307,66.751) 127.307,68.2 cw(c127.307,69.649) K10.2@126.282,68.624 ; K8.2@131.486,67.776 ccw(c130.462,66.751) 130.462,68.2 ccw(c130.462,69.649) K8.2@131.486,68.624 ; K8.2@132.335,67.776 cw(c133.359,66.751) 133.359,68.2 cw(c133.359,69.649) K8.2@132.335,68.624 ; K6.2@137.539,67.776 ccw(c136.515,66.751) 136.515,68.2 ccw(c136.515,69.649) K6.2@137.539,68.624 ; K6.2@138.388,67.776 cw(c139.412,66.751) 139.412,68.2 cw(c139.412,69.649) K6.2@138.388,68.624 ; K4.2@143.592,67.776 ccw(c142.567,66.751) 142.567,68.2 ccw(c142.567,69.649) K4.2@143.592,68.624 ; K4.2@144.44,67.776 cw(c145.465,66.751) 145.465,68.2 cw(c145.465,69.649) K4.2@144.44,68.624 ; K2.2@149.644,67.776 ccw(c148.62,66.751) 148.62,68.2 ccw(c148.62,69.649) K2.2@149.644,68.624
COM_RXD: P5.6 U13.12 | length 41.5
  Top Layer w0.3: v1(186.37,87.097) 188.486,87.097 U13.12@188.5,87.083 ; v1@186.476,86.991 cw(c186.732,86.735) 186.732,87.097 cw(c186.732,87.459) v1@186.476,87.203 ; 187.305,87.097 cw(c187.305,86.688) U13.12@187.594,86.977 ; 187.371,87.097 ccw(c187.371,87.412) U13.12@187.594,87.189
  Bottom Layer w0.3: v1@186.264,86.991 ccw(c186.008,86.735) 186.008,87.097 ccw(c186.008,87.459) v1@186.264,87.203 ; v1(186.37,87.097) 185.887,87.097 185.29,86.5 185.29,81.47 189.006,77.754 206.956,77.754 209.19,75.52 P5.6@209.19,72.9 ; P5.6@208.766,73.324 ccw(c207.741,74.349) 209.19,74.349 ccw(c210.639,74.349) P5.6@209.614,73.324
COM_TXD: P5.5 U13.11 | length 45.6
  Top Layer w0.3: v1(186.37,88.37) 188.483,88.37 U13.11@188.5,88.353 ; v1@186.476,88.264 cw(c186.732,88.008) 186.732,88.37 cw(c186.732,88.732) v1@186.476,88.476 ; 187.297,88.37 cw(c187.297,87.95) U13.11@187.594,88.247 ; 187.379,88.37 ccw(c187.379,88.674) U13.11@187.594,88.459
  Bottom Layer w0.3: 185.875,88.015 cw(c186.37,87.52) v1@186.37,88.22 ; v1(186.37,88.37) 186.23,88.37 184.67,86.81 184.69,86.79 184.69,81.13 188.67,77.15 206.71,77.15 207.96,75.9 207.96,71.59 P5.5@209.19,70.36 ; P5.5@208.59,70.36 ccw(c207.141,70.36) 208.166,71.384 ccw(c209.19,72.409) P5.5@209.19,70.96